# Altium PCB Copy of RaspberryHatBoard.PcbDoc
Units mm, origin at the board's own origin, x right, y up, seen from the top; angles counter-clockwise.
Board outline 65 x 56 mm, 2 copper layers (Top Layer, Bottom Layer); 4 components, 4 nets, 58 pads, 3 vias.
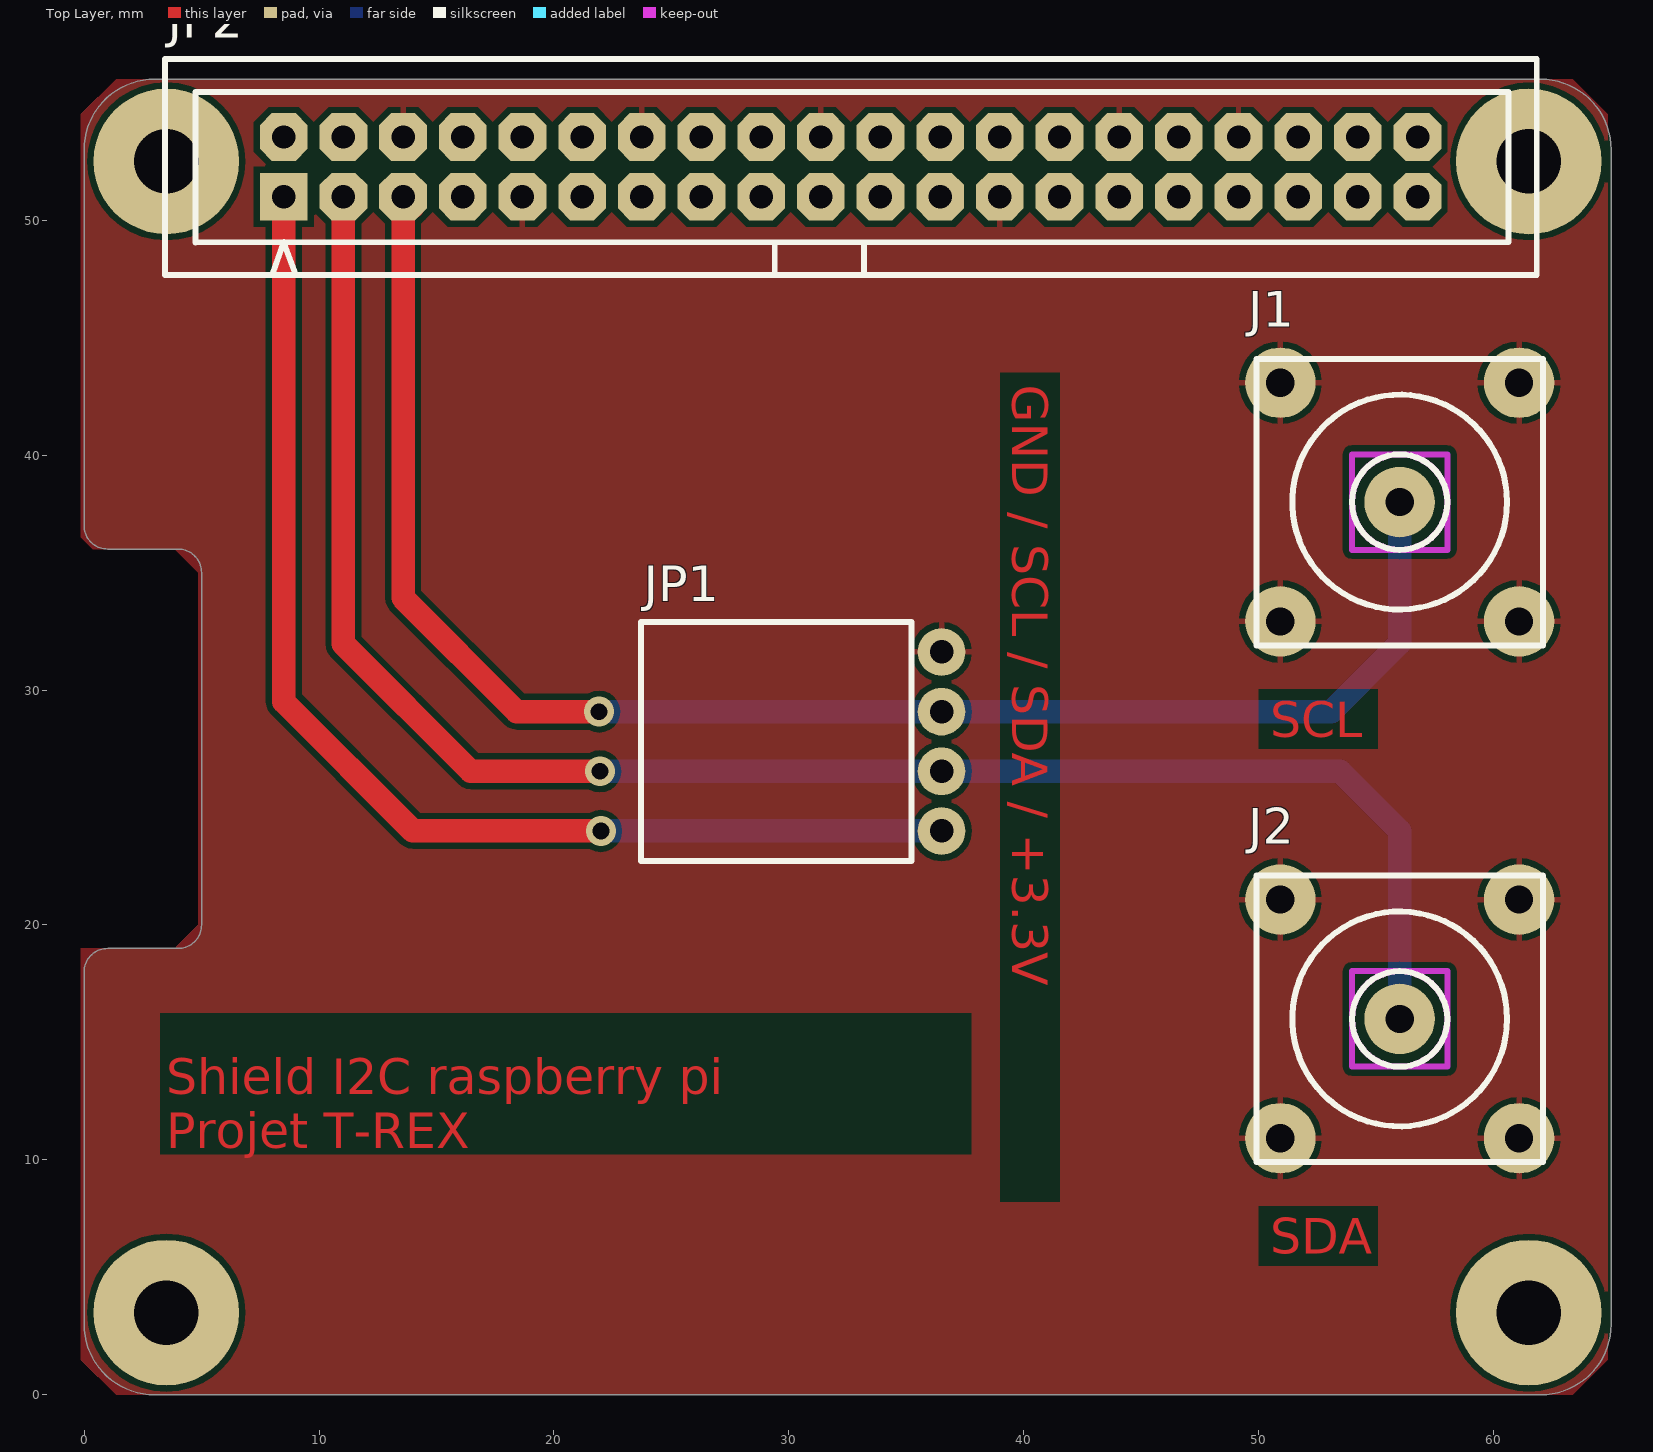
[diagram p0: Top Layer view]
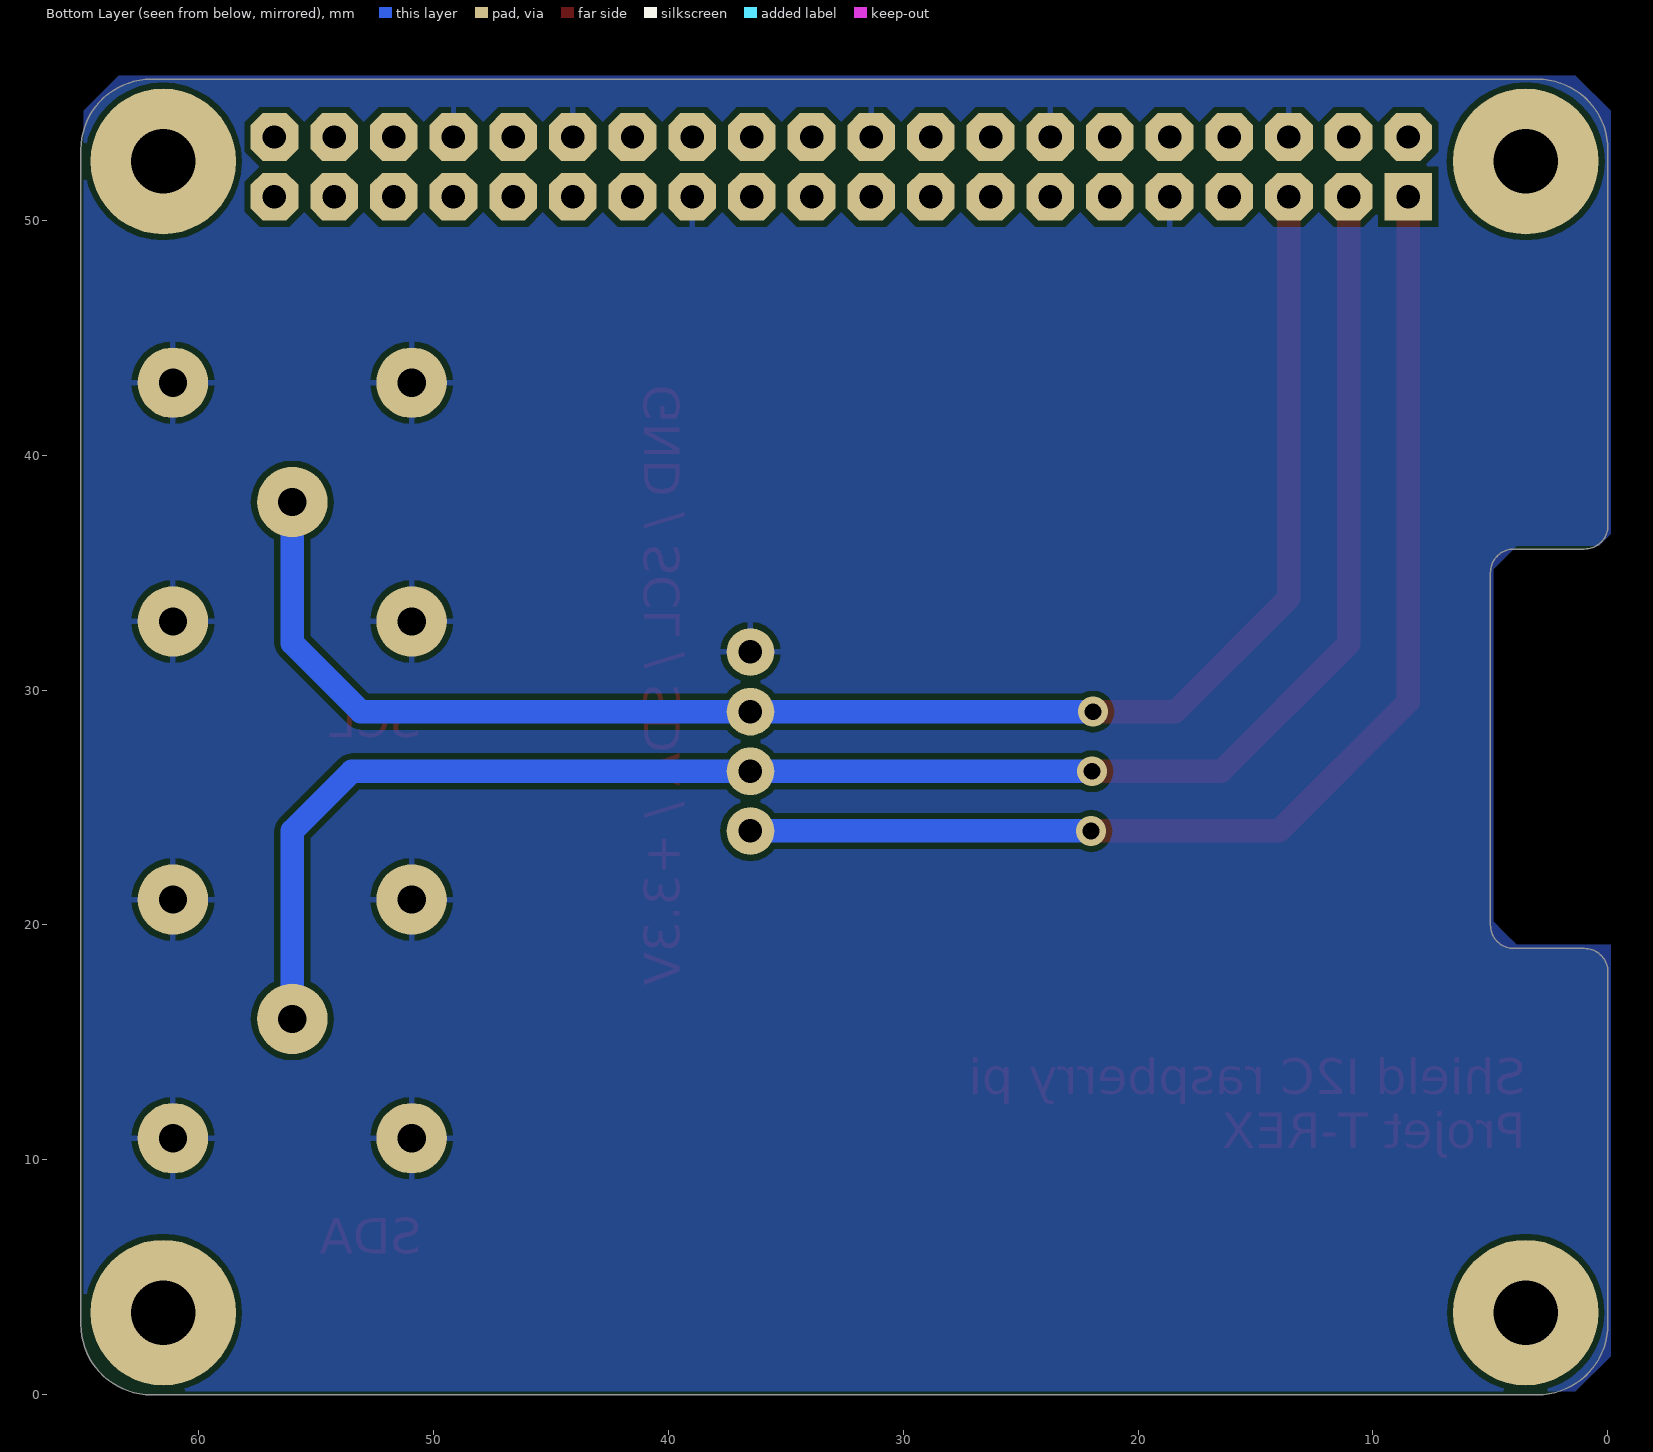
[diagram p1: Bottom Layer view, seen from below]

## Layer stack, top to bottom
Top Solder: solder mask 0.0102, Solder Resist, Dk 3.5
Top Layer: signal copper 0.0356
Dielectric 1: dielectric 0.32, FR-4, Dk 4.8
Bottom Layer: signal copper 0.0356
Bottom Solder: solder mask 0.0102, Solder Resist, Dk 3.5

## Board outline
0,3 0,18 cw(c1,18) 1,19 4,19 ccw(c4,20) 5,20 5,35 ccw(c4,35) 4,36 1,36 cw(c1,37) 0,37 0,53 cw(c3,53) 3,56 62,56 cw(c62,53) 65,53 65,3 cw(c62,3) 62,0 3,0 cw(c3,3)

## Design rules (kind name [scope] priority, off if disabled: settings)
Clearance [All] p1: gap=0.254
PolygonConnect [All] p1: connectstyle=Relief reliefconductorwidth=0.254 reliefentries=4 polygonreliefangle="90 Angle" airgapwidth=0.254
RoutingVias [All] p1: holewidth=0.711 width=1.27 viastyle="Through Hole" minholewidth=0.711 minwidth=1.27 maxholewidth=0.711 maxwidth=1.27
SolderMaskExpansion [All] p1: expansion=0.102
Width [All] p1: maxlimit=1.5 minlimit=0.254 preferedwidth=1
30 further rules are at their usual default settings.

## Components (designator, comment, footprint, x,y, rotation, side; value= is the part's Value field where it differs from the comment)
J1 "ES" BNC 56,38 r0 top
J2 "ES" BNC 56,16 r0 top
JP1 "Connecteur Autocom 4pts" "Autocom HE14 - 4 - Coudé" 36.5,24 r180 top
JP2 "HE10 2x20" "HE10 2x20" 8.5,51 r90 top

## Footprints (in the part's own frame and the unit in brackets; to place one, negate y for a bottom-side part, rotate by r counter-clockwise, add the part's x,y. Pads: shape width x height; smd on the part's side, far side on the other; paste and mask are expansions set on the pad)
"Autocom HE14 - 4 - Coudé" [mil] "Connecteur 4 points Autocom HE14 - coudé"
  round 80 hole 39.37: 1(0,0) 2(0,-100) 3(0,-200) 4(0,-300)
  silkscreen extent 50,-350 504,50, body extent -12,-350 504,50, height 198
BNC [mm]
  round 3 hole 1.2: 1(0,0) 2(-5.08,-5.08) 2(-5.08,5.08) 2(5.08,-5.08) 2(5.08,5.08)
  Top Layer keep-out circle w0.254: c0,0 r2.032
  Top Layer keep-out lines w0.254: -2.032,-2.032 -2.032,2.032 2.032,2.032 2.032,-2.032 -2.032,-2.032
  silkscreen extent -6.1,-6.1 6.1,6.1
"HE10 2x20" [mil]
  rect 80x80 hole 39.37: 1(0,0)
  oct 80x80 hole 39.37: 2(100,0) 3(0,-100) 4(100,-100) 5(0,-200) 6(100,-200) 7(0,-300) 8(100,-300) 9(0,-400) 10(100,-400) 11(0,-500) 12(100,-500) 13(0,-600) 14(100,-600) 15(0,-700) 16(100,-700) 17(0,-800) 18(100,-800) 19(0,-900) 20(100,-900) 21(0,-1000) 22(100,-1000) 23(0,-1100) 24(100,-1100) 25(0,-1200) 26(100,-1200) 27(0,-1300) 28(100,-1300) 29(0,-1400) 30(100,-1400) 31(0,-1500) 32(100,-1500) 33(0,-1600) 34(100,-1600) 35(0,-1700) 36(100,-1700) 37(0,-1800) 38(100,-1800) 39(0,-1900) 40(100,-1900)
  silkscreen extent -131,-2100 231,199

## Part data
J1 J2: library part BNC
JP1: library part "Connecteur Autocom 4 pts", "connecteur autocom HE14 4 pts"
JP2: "Header, 20-Pin, Dual row"

## Free pads (board coordinates)
  round 6.2 hole 2.75 unplated: 0(3.5,3.5) 0(3.5,52.5) 0(61.5,3.5) 0(61.5,52.5)

## Via types
v1: diameter 1.27, hole 0.711, Top Layer to Bottom Layer, 3 vias

## Nets (pads, with @x,y where several pads share a name; then routed paths per layer and width w, separated by ;. In a path a pad name is that pad's centre, name@x,y a point inside that pad or via, vN(x,y) a via of type N, cw(c..) or ccw(c..) an arc to the next point about the centre after c; other vN are vias at no path point)
GND: J1.2 J2.2 JP1.4 JP2.6 JP2.9 JP2.14 JP2.20 JP2.25 JP2.30 JP2.34
SCL: J1.1 JP1.3 JP2.5 | length 69.3
  Top Layer w1: JP2.5@14,50.58 JP2.5 13.58,33.92 18.42,29.08 v1(21.92,29.08)
  Bottom Layer w1: v1(21.92,29.08) JP1.3 53.08,29.08 56,32 J1.1
SDA: J2.1 JP1.2 JP2.3 | length 75.3
  Top Layer w1: JP2.3 11.04,31.96 16.46,26.54 v1(21.96,26.54)
  Bottom Layer w1: v1(21.96,26.54) JP1.2 53.46,26.54 56,24 J2.1
VCC: JP1.1 JP2.1 | length 51.8
  Top Layer w1: JP2.1 8.5,29.5 14,24 v1(22,24)
  Bottom Layer w1: v1(22,24) JP1.1
pads on no net: JP2.2 JP2.4 JP2.7 JP2.8 JP2.10 JP2.11 JP2.12 JP2.13 JP2.15 JP2.16 JP2.17 JP2.18 JP2.19 JP2.21 JP2.22 JP2.23 JP2.24 JP2.26 JP2.27 JP2.28 JP2.29 JP2.31 JP2.32 JP2.33 JP2.35 JP2.36 JP2.37 JP2.38 JP2.39 JP2.40

## Polygon pours and split planes (outlines as drawn)
GND on Bottom Layer "Mechanical 1-No Net" (solid, remove dead copper, pour order 2): 2.388,56.147 62.888,56.147 63.388,56.147 63.888,55.647 64.888,54.647 64.888,54.147 64.888,1.647 63.388,0.147 1.888,0.147 1.388,0.147 -0.112,1.647 -0.112,19.147 3.888,19.147 4.388,19.647 4.888,20.147 4.888,35.147 3.888,36.147 0.388,36.147 -0.112,36.647 -0.112,53.647 -0.112,54.647 1.388,56.147
GND on Top Layer "Mechanical 1-No Net" (solid, remove dead copper, pour order 4): 1.364,56 63.364,56 64.864,54.5 64.864,1.5 63.364,0 1.364,0 -0.136,1.5 -0.136,19 3.864,19 4.864,20 4.864,35 3.864,36 0.364,36 -0.136,36.5 -0.136,54.5

## Other copper
Top Layer:
  text "GND / SCL / SDA / +3.3V" at 39.5,43 h1.52 r270
  text "SCL" at 50.5,28 h1.52
  text "Shield I2C raspberry pi / Projet T-REX" at 3.5,10.5 h1.52
  text "SDA" at 50.5,6 h1.52

## Silkscreen, mask and mechanical layers (free items; w line width, h text height)
Mechanical 1:
  lines w0.127: 7.87,50.73 8.87,51.73 ; 7.87,51.73 8.87,50.73 ; 32,52 33,53 ; 32,53 33,52 ; 0,3 ccw(c3,3) 3,0 62,0 ccw(c62,3) 65,3 65,53 ccw(c62,53) 62,56 3,56 ccw(c3,53) 0,53 0,37 ccw(c1,37) 1,36 4,36 cw(c4,35) 5,35 5,20 cw(c4,20) 4,19 1,19 ccw(c1,18) 0,18 0,3
Milling:
  lines w2: 45,4 45,19

## Dimensions
0,53 to 65,53 on Docu
62,56 to 62,0 on Docu
3,53 to 1,64 on Docu
5,35 to 0,30 on Docu
4,36 to 4,19 on Docu
4,36 to 3,56 on Docu
1,18 to 1,18 on Docu
0,18 to 45,4 on Docu
0,3 to 3.5,3.5 on Docu
3,0 to 3.5,3.5 on Docu